# EAGLE board DWSTM32NEW (EAGLE 8.3.2)
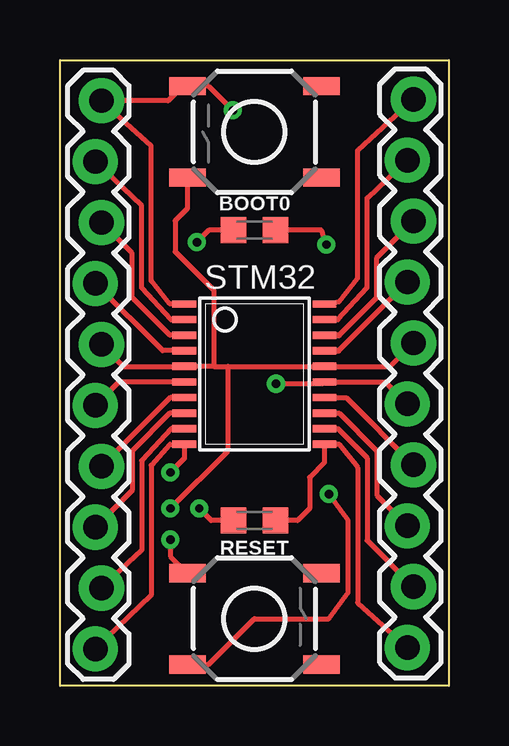
[diagram p0: board, top side]
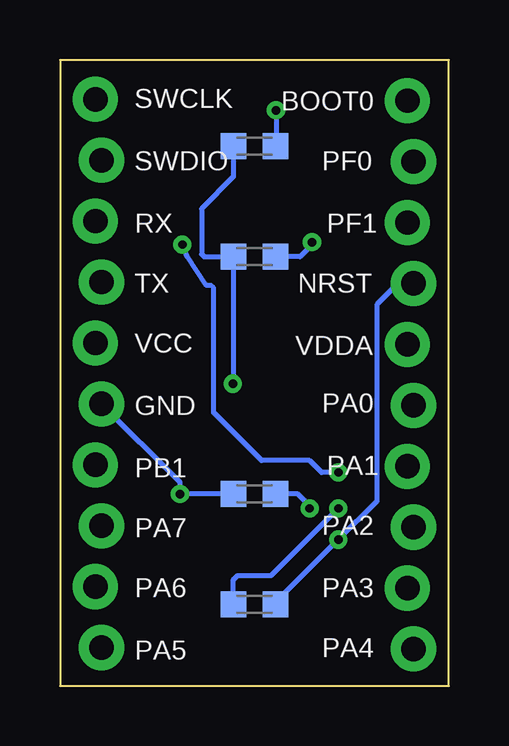
[diagram p1: board, bottom side, seen from below]

Size 16.2 x 26.1 mm. Coordinates in mm from the lower left corner, seen from the top.
Outline: 0,26.1 16.2,26.1 16.2,0 0,0 0,26.1
Copper layers (1*16): Top 0.035mm / dielectric 1.5mm / Bottom 0.035mm
Design rules "default": minimum track width 6mil, minimum drill 0.35mm, track to track 6mil, track to pad 6mil, pad to pad 6mil, via to via 6mil, smd to smd 6mil, copper to edge 40mil, drill to drill 6mil, minimum pad ring 10mil, minimum via ring 8mil, stop-mask expansion 4mil, vias tented up to drill 0mil, thermal gap 10mil

## Footprints (pad centres in the part's own frame; a part is rotated, then mirrored left to right if it is on the bottom)
TACTILE_SWITCH_SMD_5.2MM = smd 1.524 x 0.762: 1 -2.794,1.905; 2 2.794,1.905; 3 -2.794,-1.905; 4 2.794,-1.905
C0603K = smd 1.05 x 1.08: 1 -0.875,0; 2 0.875,0
1X10_LOCK = drill 1.016 pad 1.88: 1 0,0.127; 2 2.54,-0.127; 3 5.08,0.127; 4 7.62,-0.127; 5 10.16,0.127; 6 12.7,-0.127; 7 15.24,0.127; 8 17.78,-0.127; 9 20.32,0.127; 10 22.86,-0.127
TSSOP20 = smd 0.305 x 0.991: 1 -2.925,-2.918; 2 -2.275,-2.918; 3 -1.625,-2.918; 4 -0.975,-2.918; 5 -0.325,-2.918; 6 0.325,-2.918; 7 0.975,-2.918; 8 1.625,-2.918; 9 2.275,-2.918; 10 2.925,-2.918; 11 2.925,2.918; 12 2.275,2.918; 13 1.625,2.918; 14 0.975,2.918; 15 0.325,2.918; 16 -0.325,2.918; 17 -0.975,2.918; 18 -1.625,2.918; 19 -2.275,2.918; 20 -2.925,2.918

## Placement (x,y rotation side)
BOOT0  [TACTILE_SWITCH_SMD_5.2MM]  8.1,23.1 180 top
LED4  [C0603K]  8.1,19 180 top
LED5  [C0603K]  8.1,6.9 0 top
P1  [1X10_LOCK]  1.6,24.4 270 top
P2  [1X10_LOCK]  14.6,1.6 90 top
RBOOT0  [C0603K]  8.1,22.5 0 bottom
RESET  [TACTILE_SWITCH_SMD_5.2MM]  8.1,2.8 0 top
RLED4  [C0603K]  8.1,17.9 0 bottom
RLED5  [C0603K]  8.1,8 0 bottom
RRESET  [C0603K]  8.1,3.4 0 bottom
STM32  [TSSOP20]  8.1,13 270 top

## Library data of the parts
BOOT0 RESET = SparkFun-Switches
LED4 LED5 RBOOT0 RLED4 RLED5 RRESET = resistor
P1 P2 = SparkFun-Connectors
STM32 = ref-packages

## Nets
BOOT0: BOOT0.4 P1.1 RBOOT0.2 STM32.1
GND: P2.5 RBOOT0.1 RESET.3 RLED4.1 RLED5.1 STM32.15
NRST: P1.4 RESET.1 RRESET.2 STM32.4
PA0: P1.6 STM32.6
PA1: P1.7 STM32.7
PA2: P1.8 STM32.8
PA3: P1.9 STM32.9
PA4: LED4.1 P1.10 STM32.10
PA5: LED5.2 P2.1 STM32.11
PA6: P2.2 STM32.12
PA7: P2.3 STM32.13
PB1: P2.4 STM32.14
PF0: P1.2 STM32.2
PF1: P1.3 STM32.3
RX: P2.8 STM32.18
SWCLK: P2.10 STM32.20
SWDIO: P2.9 STM32.19
TX: P2.7 STM32.17
VCC: BOOT0.2 P1.5 P2.6 RRESET.1 STM32.5 STM32.16
X4: LED4.2 RLED4.2
X5: LED5.1 RLED5.2

## Tracks (layer width: path | path; a pad name or v marks a point on that pad's centre or on a via)
BOOT0  (via drill 0.35 pad 0.55)
  Top 0.2: STM32.1 4.58,15.92 3.8,16.9 3.8,22.53 P1.1 4.5,24.4 5.11,25 BOOT0.4 6.2,25 v7.2,24
  Bottom 0.2: v7.2,24 7.2,22.52 RBOOT0.2
GND  (via drill 0.35 pad 0.55)
  Top 0.2: P2.5 13.56,12.67 STM32.15 10.94,12.6 v9,12.6 | RESET.3 6.2,0.9 8.1,2.8 11.2,2.8 12,3.9 12,6.9 v11.2,8
  Bottom 0.2: RLED5.1 v11.2,8 11.2,8.49 P2.5 | RBOOT0.1 8.98,21.23 10.3,19.9 10.3,18 10.2,17.9 RLED4.1 8.98,12.62 v9,12.6
NRST  (via drill 0.35 pad 0.55)
  Top 0.2: STM32.4 4.28,13.98 P1.4 | v4.6,6.1 4.6,5.41 RESET.1
  Bottom 0.2: P1.4 2.12,16.78 3,15.9 3,7.7 v4.6,6.1 7.23,3.48 RRESET.2
PA0
  Top 0.2: STM32.6 2.45,12.67 P1.6
PA1
  Top 0.2: STM32.7 4.59,12.02 P1.7
PA2
  Top 0.2: STM32.8 4.58,11.38 3,9.8 3,8.15 P1.8
PA3
  Top 0.2: STM32.9 4.62,10.73 3.4,9.4 3.4,5.65 P1.9
PA4  (via drill 0.35 pad 0.55)
  Top 0.2: P1.10 3.8,3.77 3.8,9.2 4.58,10.08 STM32.10 5.18,9.48 v4.6,8.9 | v11.1,18.4 10.9,19 LED4.1
  Bottom 0.2: v4.6,8.9 5.3,8.9 5.8,9.4 7.8,9.4 9.8,11.4 9.8,16.6 9.9,16.7 10.1,16.7 10.9,17.9 v11.1,18.4
PA5
  Top 0.2: P2.1 12.4,3.47 12.4,9.1 11.62,10.08 STM32.11 11.02,9.32 10.4,8.7 10.4,7.4 9.9,6.9 LED5.2
PA6
  Top 0.2: STM32.12 11.58,10.73 12.8,9.5 12.8,6.07 P2.2
PA7
  Top 0.2: STM32.13 11.62,11.38 13.2,9.8 13.2,7.95 P2.3
PB1
  Top 0.2: STM32.14 11.92,12.02 P2.4
PF0
  Top 0.2: STM32.2 4.62,15.27 3.4,16.6 3.4,20.03 P1.2
PF1
  Top 0.2: STM32.3 4.58,14.62 3,16.2 3,18.05 P1.3
RX
  Top 0.2: 13.2,16.2 13.2,17.85 P2.8
  Top 0.203: 11.62,14.62 13.2,16.2
  Top 0.254: STM32.18 11.62,14.62
SWCLK
  Top 0.2: STM32.20 11.62,16.02 12.4,17 12.4,22.33 P2.10
SWDIO
  Top 0.2: STM32.19 11.58,15.27 12.8,16.6 12.8,20.35 P2.9
TX
  Top 0.203: 11.61,13.98 P2.7
  Top 0.254: STM32.17 11.61,13.98
VCC  (via drill 0.35 pad 0.55)
  Top 0.2: P2.6 13.75,13.33 STM32.16 7,13.33 | P1.5 2.64,13.33 STM32.5 6.4,13.33 | 6.4,13.33 7,13.33 | v4.6,7.4 7,9.8 7,13.33 | BOOT0.2 5.31,19.91 4.8,19.4 4.8,18.1 6.4,16.5 6.4,13.33
  Bottom 0.2: RRESET.1 8.98,4.42 8.8,4.6 7.4,4.6 v4.6,7.4
X4  (via drill 0.35 pad 0.55)
  Top 0.2: LED4.2 6.2,19 v5.7,18.5
  Bottom 0.2: v5.7,18.5 5.7,18.4 6.2,17.9 RLED4.2
X5  (via drill 0.35 pad 0.55)
  Top 0.2: LED5.1 6.3,6.9 v5.8,7.4
  Bottom 0.2: v5.8,7.4 5.8,7.5 6.3,8 RLED5.2

## Text on the board
bNames: BOOT0 | SWCLK | PF0 | SWDIO | PF1 | RX | NRST | TX | VDDA | VCC | PA0 | GND | PA1 | PB1 | PA2 | PA7 | PA3 | PA6 | PA4 | PA5